# EAGLE board OpenBook_PCB_Design (EAGLE 9.7.0)
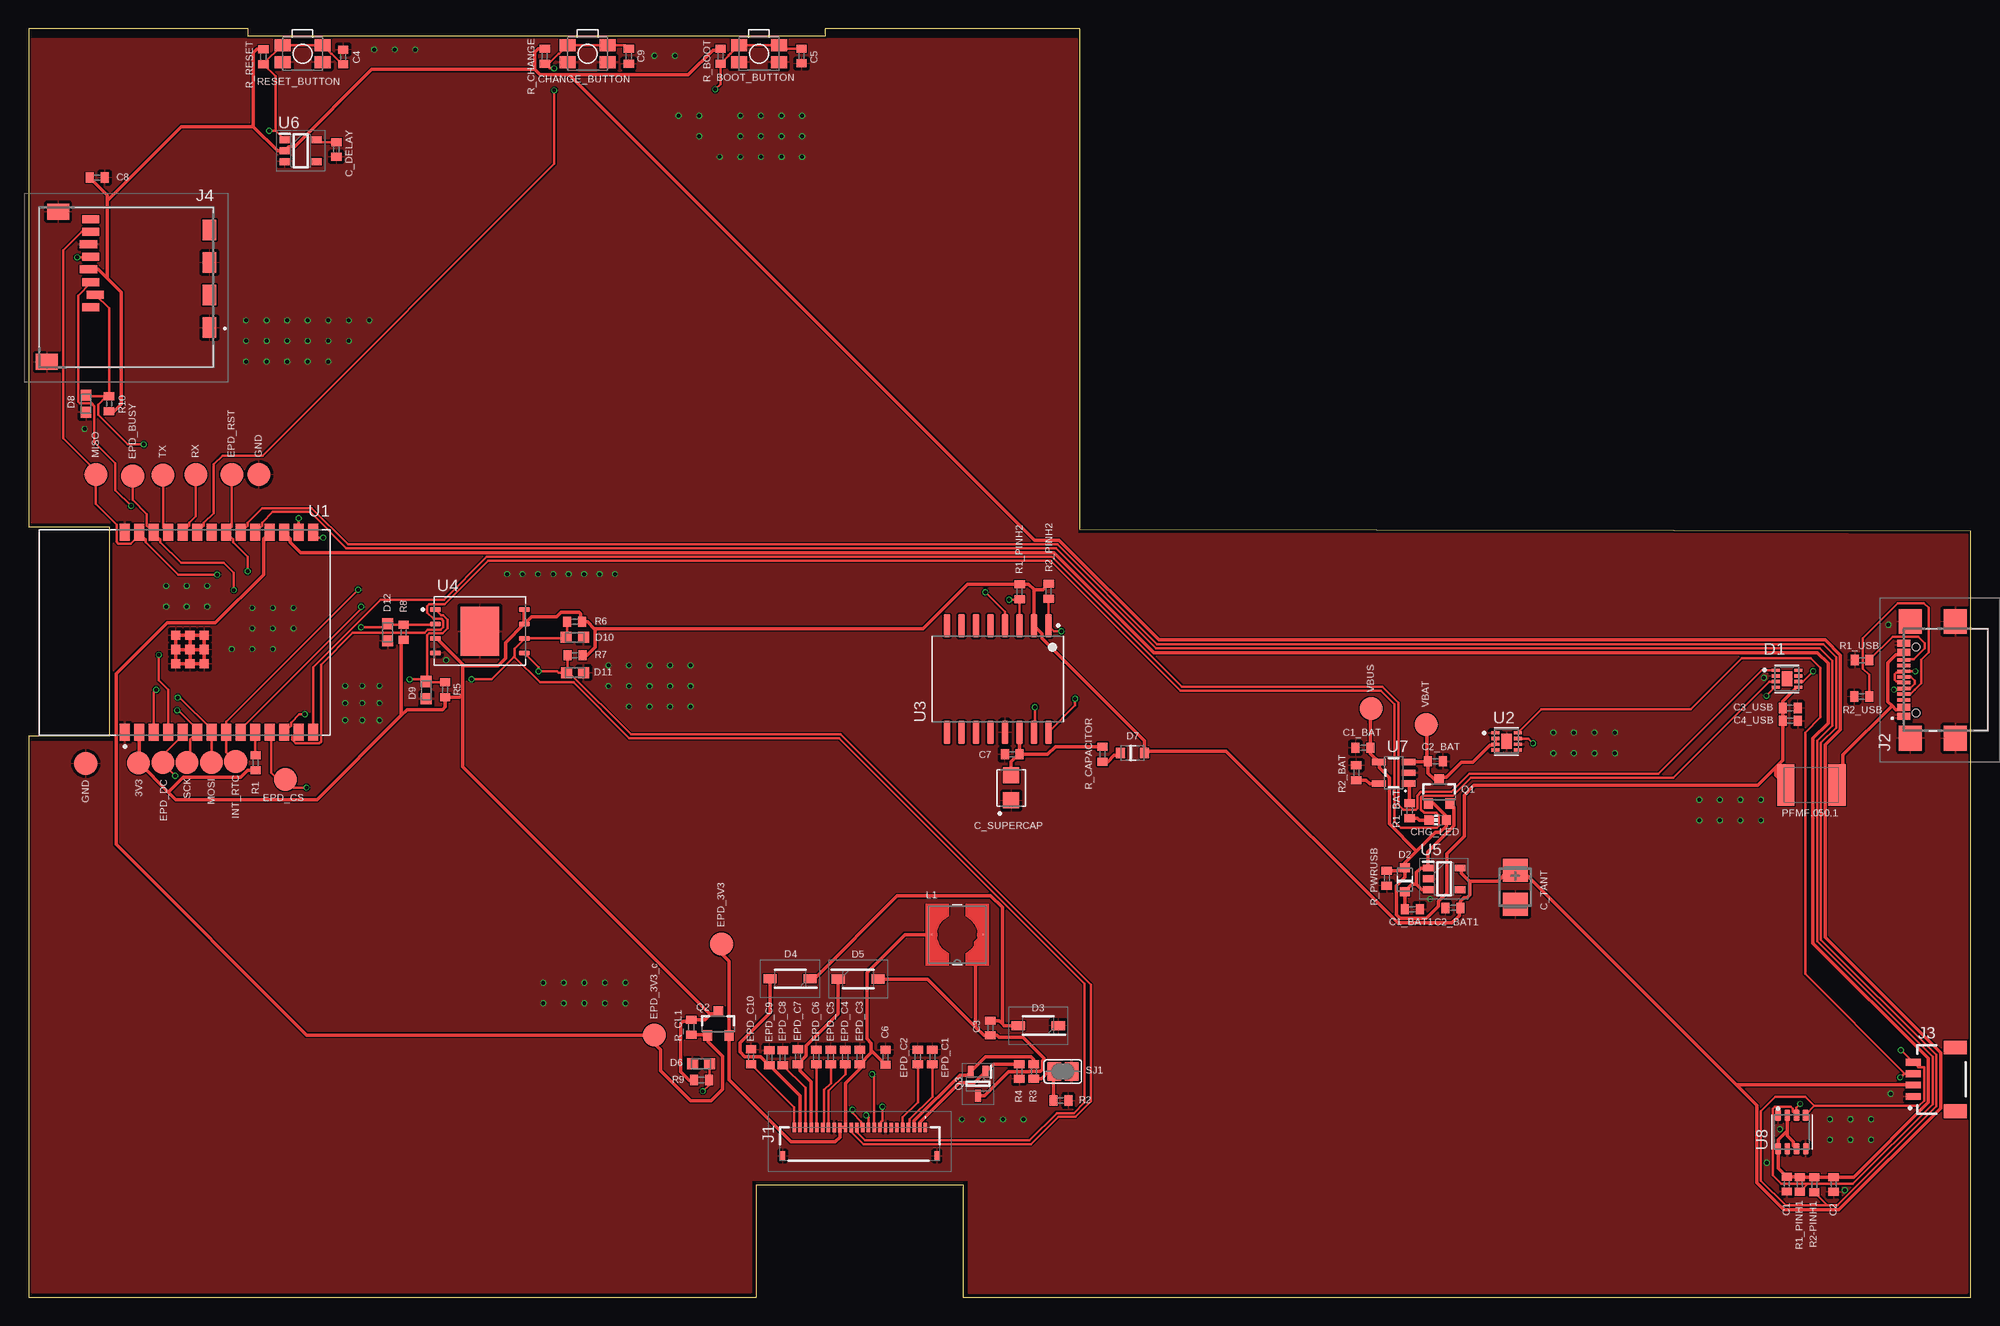
[diagram p0: board, top side]
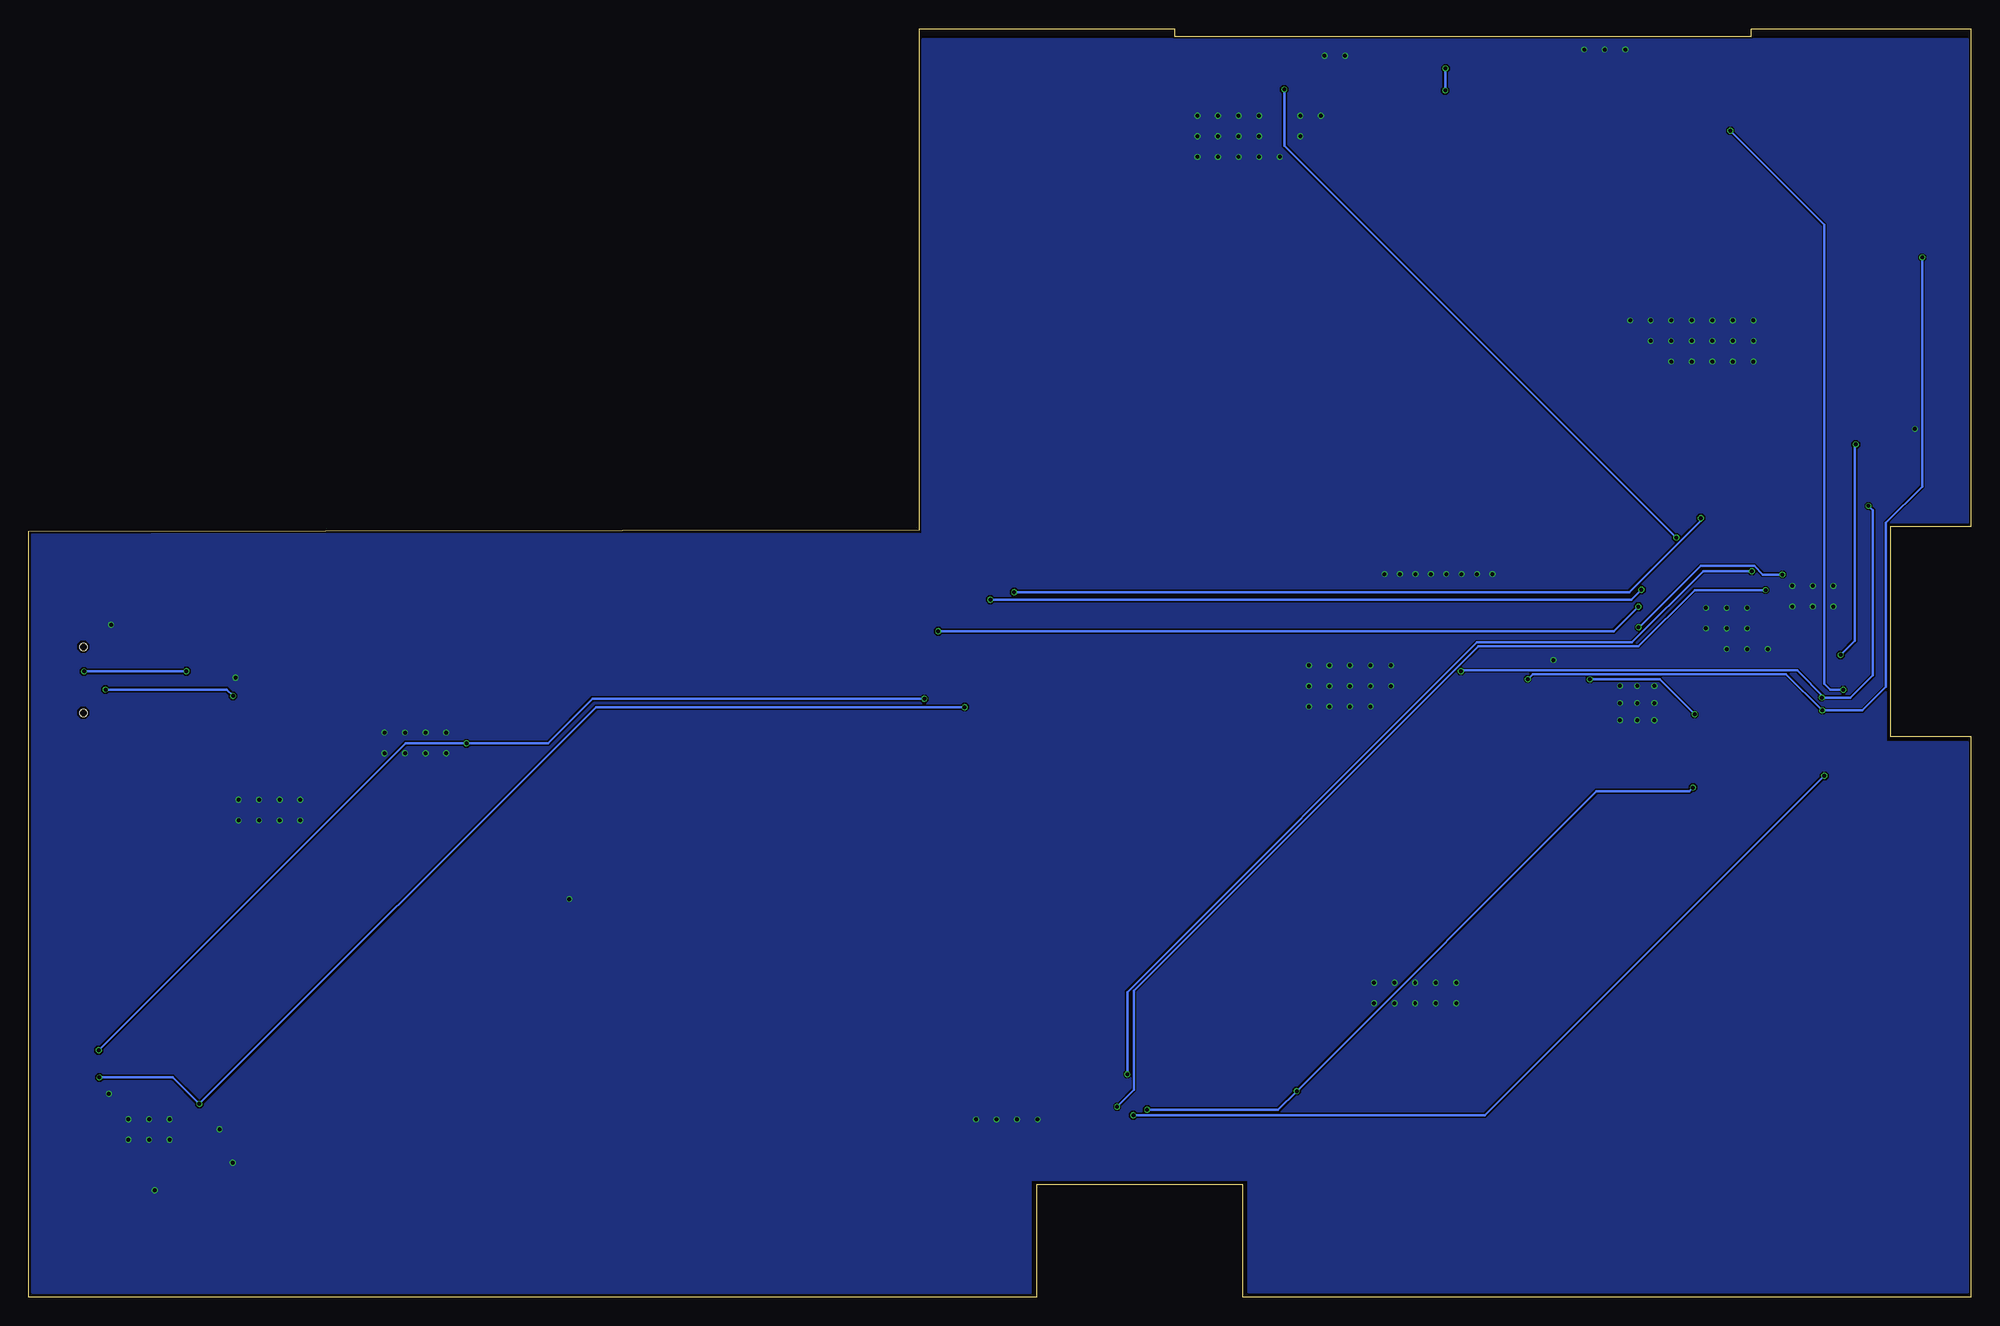
[diagram p1: board, bottom side, seen from below]

Size 170.08 x 111.07 mm. Coordinates in mm from the lower left corner, seen from the top.
Outline: 0,0 63.76,0 63.76,9.87 81.82,9.87 81.82,0.01 131.18,0 170.08,0 170.08,67.07 92.07,67.2 92.07,111.07 69.75,111.07 69.75,110.38 19.21,110.38 19.21,111.07 0,111.07 0,67.47 7.08,67.46 7.08,49.1 0,49.11 0,0
Outline: 0,0 0,0
Copper layers (1*16): Top / Bottom
Stack-up Default Layer Stack: Top User Defined 0.035mm / Dielectric-1 Core:086 1mm / Bottom User Defined 0.035mm
Design rules: minimum copper width 0.2mm, minimum drill size 0.2mm, copper clearance wire_polygon to wire_polygon 5mil, copper clearance wire_polygon to pad_smd 5mil, copper clearance wire_polygon to via 5mil, copper clearance pad_smd to pad_smd 5mil, copper clearance pad_smd to via 5mil, copper clearance via to via 5mil, copper clearance smd to pad (same net) 5mil, copper clearance smd to via (same net) 5mil, copper clearance smd to smd (same net) 5mil, dimension clearance 0.2mm, restrict clearance 0mil, via restrict clearance 0mil, solder-mask clearance 0mil, drill distance 6mil, keepout clearance 0mil

## Footprints (pad centres in the part's own frame; a part is rotated, then mirrored left to right if it is on the bottom)
MYBUTTON = smd 1.4 x 1.05: 1 1.75,0.75; 2 -1.75,0.75; 3 -1.75,-0.75; 4 1.75,-0.75
EAGLE-LTSPICE_C0402 = smd 0.7 x 0.9: 1 -0.65,0; 2 0.65,0
CAPCP3225X100N = smd 1.4 x 1.4: 1 -1.1,0; 2 1.1,0
RCL_CT3528 = smd 2 x 2.2: + -1.5,0; - 1.5,0
ADAFRUIT_CHIP-LED0603 = smd 0.8 x 0.8: A 0,-0.75; C 0,0.75
SON50P200X200X80-9N = smd 0.76 x 0.27: 1 -0.985,0.75; 2 -0.985,0.25; 3 -0.985,-0.25; 4 -0.985,-0.75; 5 0.985,-0.75; 6 0.985,-0.25; 7 0.985,0.25; 8 0.985,0.75 | smd 0.9 x 1.3: 9 0,0
ESP32_WROVER_AVX---SD0805S020S1R0_AVX_SD0805S020S1R0_0 = smd 0.8 x 0.9: 1 -1.05,0; 2 1.05,0
SOD3716X135N = smd 1.15 x 0.8: 1 -1.75,0; 2 1.75,0
DIOC1608X36N = smd 0.97 x 0.94: 1 -0.75,0; 2 0.75,0
FH34SRJ24S05SH99 = smd 0.3 x 0.8: 1 5.75,1.45; 2 5.25,1.45; 3 4.75,1.45; 4 4.25,1.45; 5 3.75,1.45; 6 3.25,1.45; 7 2.75,1.45; 8 2.25,1.45; 9 1.75,1.45; 10 1.25,1.45; 11 0.75,1.45; 12 0.25,1.45; 13 -0.25,1.45; 14 -0.75,1.45; 15 -1.25,1.45; 16 -1.75,1.45; 17 -2.25,1.45; 18 -2.75,1.45; 19 -3.25,1.45; 20 -3.75,1.45; 21 -4.25,1.45; 22 -4.75,1.45; 23 -5.25,1.45; 24 -5.75,1.45 | smd 0.4 x 0.8: MP1 6.75,-1.05; MP2 -6.75,-1.05
SAMACSYS_PARTS_USB4110GFA = smd 0.3 x 1.15: A1 -3.35,3.678; A4 -2.55,3.678; A5 -1.25,3.678; A6 -0.25,3.678; A7 0.25,3.678; A8 1.25,3.678; A9 2.55,3.678; A12 3.35,3.678; B1 3.05,3.678; B4 2.25,3.678; B5 1.75,3.678; B6 0.75,3.678; B7 -0.75,3.678; B8 -1.75,3.678; B9 -2.25,3.678; B12 -3.05,3.678 | smd 2.18 x 2: MP1 -5.11,-0.827; MP2 5.11,-0.827; MP3 -5.11,3.103; MP4 5.11,3.103 | hole 0.65: -2.89,2.603; 2.89,2.603
JST04_1MM_RA = smd 0.6 x 1.35: 1 -1.5,0; 2 -0.5,0; 3 0.5,0; 4 1.5,0 | smd 1.2 x 2: NC1 2.8,-3.675; NC2 -2.8,-3.675
112ATAARR03ATTEND = smd 1.8 x 1.2: G1 10.6,10.4; G2 4.9,10.4; S1 7.75,10.4; S2 2.05,10.4 | smd 1.4 x 1.9: G3 13.6,-3.85; G4 0.45,-2.85 | smd 0.7 x 1.5: P1 8.8,0; P2 7.7,0.4; P3 6.6,0; P4 5.5,-0.2; P5 4.4,0; P6 3.3,-0.2; P7 2.2,0; P8 1.1,0
IND_4828-WE-TPC_WRE = smd 0.127 x 0.127: 1 -2.286,0; 2 2.286,0
ESP32C6_VARISTOR_CT/CN1812 = smd 1.5 x 3.6: 1 -2.25,0; 2 2.25,0
ESP32_WROVER_SPARKFUN-DISCRETESEMI_SOT23-3 = smd 0.8 x 0.9: 1 -0.95,-1; 2 0.95,-1; 3 0,1.1
SOT65P210X110-3N = smd 1.05 x 0.5: 1 -1.05,0.65; 2 -1.05,-0.65; 3 1.05,0
ESP32_WROVER_EAGLE-LTSPICE_R0402 = smd 0.7 x 0.9: 1 -0.65,0; 2 0.65,0
SJ = smd 1.168 x 1.6: 1 -0.762,0; 2 0.762,0
TP20R = smd 2 x 2: TP 0,0
XCVR_ESP32-C6-WROOM-1-N8 = smd 1.5 x 0.9: 1 -8.75,5.26; 2 -8.75,3.99; 3 -8.75,2.72; 4 -8.75,1.45; 5 -8.75,0.18; 6 -8.75,-1.09; 7 -8.75,-2.36; 8 -8.75,-3.63; 9 -8.75,-4.9; 10 -8.75,-6.17; 11 -8.75,-7.44; 12 -8.75,-8.71; 13 -8.75,-9.98; 14 -8.75,-11.25; 15 8.75,-11.25; 16 8.75,-9.98; 17 8.75,-8.71; 18 8.75,-7.44; 19 8.75,-6.17; 20 8.75,-4.9; 21 8.75,-3.63; 22 8.75,-2.36; 23 8.75,-1.09; 24 8.75,0.18; 25 8.75,1.45; 26 8.75,2.72; 27 8.75,3.99; 28 8.75,5.26 | smd 0.8 x 0.8: 29_1 -2.755,0.79; 29_2 -1.505,0.79; 29_3 -0.255,0.79; 29_4 -2.755,-0.46; 29_5 -1.505,-0.46; 29_6 -0.255,-0.46; 29_7 -2.755,-1.71; 29_8 -1.505,-1.71; 29_9 -0.255,-1.71
SOIC127P1032X265-16N = smd 2.05 x 0.59: 1 -4.655,4.445; 2 -4.655,3.175; 3 -4.655,1.905; 4 -4.655,0.635; 5 -4.655,-0.635; 6 -4.655,-1.905; 7 -4.655,-3.175; 8 -4.655,-4.445; 9 4.655,-4.445; 10 4.655,-3.175; 11 4.655,-1.905; 12 4.655,-0.635; 13 4.655,0.635; 14 4.655,1.905; 15 4.655,3.175; 16 4.655,4.445
SON127P600X800X80-9N = smd 0.94 x 0.44: 1 -3.895,1.905; 2 -3.895,0.635; 3 -3.895,-0.635; 4 -3.895,-1.905; 5 3.895,-1.905; 6 3.895,-0.635; 7 3.895,0.635; 8 3.895,1.905 | smd 3.4 x 4.3: 9 0,0
SOT95P280X120-5N = smd 0.9 x 0.6: 1 -1.4,0.95; 2 -1.4,0; 3 -1.4,-0.95; 4 1.4,-0.95; 5 1.4,0.95
SOT95P280X125-5N = smd 0.9 x 0.6: 1 -1.4,0.95; 2 -1.4,0; 3 -1.4,-0.95; 4 1.4,-0.95; 5 1.4,0.95
ESP32_WROVER_SPARKFUN-IC-POWER_SOT23-5 = smd 0.55 x 1.2: 1 -0.95,-1.3; 2 0,-1.3; 3 0.95,-1.3; 4 0.95,1.3; 5 -0.95,1.3
ESP32_WROVER_BME680_PSON80P300X300X100-8N = smd 1.016 x 0.5: 1 1.458,1.2; 2 1.458,0.4; 3 1.458,-0.4; 4 1.458,-1.2; 5 -1.458,-1.22; 6 -1.458,-0.4; 7 -1.458,0.4; 8 -1.458,1.2

## Placement (x,y rotation side)
BOOT_BUTTON  [MYBUTTON]  63.95,108.87 180 top
C1  100nF  [EAGLE-LTSPICE_C0402]  153.95,9.92 270 top
C1_BAT  4.7uF  [EAGLE-LTSPICE_C0402]  116.84,48.11 180 top
C1_BAT1  4.7uF  [EAGLE-LTSPICE_C0402]  121.16,33.98 0 top
C2  100nF  [EAGLE-LTSPICE_C0402]  158.05,9.88 270 top
C2_BAT  4.7uF  [EAGLE-LTSPICE_C0402]  123.19,46.93 0 top
C2_BAT1  4.7uF  [EAGLE-LTSPICE_C0402]  124.73,34.09 180 top
C3  4.7uF/25V  [EAGLE-LTSPICE_C0402]  84.22,23.59 270 top
C3_USB  100nF  [EAGLE-LTSPICE_C0402]  154.26,51.6 0 top
C4  1uF  [EAGLE-LTSPICE_C0402]  27.55,108.58 90 top
C4_USB  4.7uF  [EAGLE-LTSPICE_C0402]  154.26,50.48 0 top
C5  100nF  [EAGLE-LTSPICE_C0402]  67.69,108.67 270 top
C6  10uF  [EAGLE-LTSPICE_C0402]  75.03,21.04 90 top
C7  100nF  [EAGLE-LTSPICE_C0402]  86.13,47.54 180 top
C8  100nF  [EAGLE-LTSPICE_C0402]  6.01,98.03 0 top
C9  100nF  [EAGLE-LTSPICE_C0402]  52.56,108.66 270 top
C_DELAY  100nF  [EAGLE-LTSPICE_C0402]  26.95,100.49 270 top
C_SUPERCAP  CPH3225A  [CAPCP3225X100N]  86.04,44.6 90 top
C_TANT  100uF  [RCL_CT3528]  130.18,35.9 270 top
CHANGE_BUTTON  [MYBUTTON]  48.95,108.87 180 top
CHG_LED  [ADAFRUIT_CHIP-LED0603]  123.39,41.79 90 top
D1  USBLC6-2SC6Y  [SON50P200X200X80-9N]  153.97,54.15 0 top
D2  ESP32_WROVER_AVX---SD0805S020S1R0_AVX_SD0805S020S1R0_0_0AVX_SD0805S020S1R0_0_0  [ESP32_WROVER_AVX---SD0805S020S1R0_AVX_SD0805S020S1R0_0]  120.51,36.57 90 top
D3  MBR0530  [SOD3716X135N]  88.41,23.79 180 top
D4  MBR0530  [SOD3716X135N]  66.69,27.89 180 top
D5  MBR0530  [SOD3716X135N]  72.65,27.87 0 top
D6  PGB1010603MR  [DIOC1608X36N]  58.88,20.45 0 top
D7  ESP32_WROVER_AVX---SD0805S020S1R0_AVX_SD0805S020S1R0_0_0AVX_SD0805S020S1R0_0_0  [ESP32_WROVER_AVX---SD0805S020S1R0_AVX_SD0805S020S1R0_0]  96.66,47.66 0 top
D8  PGB1010603MR  [DIOC1608X36N]  5.03,78.23 90 top
D9  PGB1010603MR  [DIOC1608X36N]  34.82,53.16 90 top
D10  PGB1010603MR  [DIOC1608X36N]  47.83,57.78 180 top
D11  PGB1010603MR  [DIOC1608X36N]  47.86,54.69 180 top
D12  PGB1010603MR  [DIOC1608X36N]  31.44,58.21 90 top
EPD_C1  1uF/50V  [EAGLE-LTSPICE_C0402]  79.14,21.05 270 top
EPD_C2  1uF/50V  [EAGLE-LTSPICE_C0402]  77.87,21.05 270 top
EPD_C3  0.1uF/50V  [EAGLE-LTSPICE_C0402]  72.79,21.05 270 top
EPD_C4  1uF/50V  [EAGLE-LTSPICE_C0402]  71.52,21.05 270 top
EPD_C5  1uF/50V  [EAGLE-LTSPICE_C0402]  70.25,21.05 270 top
EPD_C6  1uF/50V  [EAGLE-LTSPICE_C0402]  68.98,21.05 270 top
EPD_C7  1uF/50V  [EAGLE-LTSPICE_C0402]  67.36,21.07 270 top
EPD_C8  1uF/50V  [EAGLE-LTSPICE_C0402]  66.03,20.99 270 top
EPD_C9  1uF/50V  [EAGLE-LTSPICE_C0402]  64.87,20.98 270 top
EPD_C10  1uF/50V  [EAGLE-LTSPICE_C0402]  63.27,21.06 270 top
J1  FH34SRJ-24S-0.5SH_99_  [FH34SRJ24S05SH99]  72.79,13.43 0 top
J2  SAMACSYS_PARTS_USB4110-GF-A  [SAMACSYS_PARTS_USB4110GFA]  167.88,54.06 90 top
J3  QWIIC_RIGHT_ANGLE  [JST04_1MM_RA]  165.03,19.09 90 top
J4  112A-TAAR-R03_ATTEND  [112ATAARR03ATTEND]  5.45,95.49 270 top
L1  68uH  [IND_4828-WE-TPC_WRE]  81.32,31.75 180 top
PFMF.050.1  ESP32C6_VARISTORCN1812  [ESP32C6_VARISTOR_CT/CN1812]  156.1,44.85 180 top
Q1  20V/4.2A/52mΩ/1.4W  [ESP32_WROVER_SPARKFUN-DISCRETESEMI_SOT23-3]  123.51,44.24 0 top
Q2  20V/4.2A/52mΩ/1.4W  [ESP32_WROVER_SPARKFUN-DISCRETESEMI_SOT23-3]  60.39,23.93 0 top
Q3  SI1308EDL-T1-GE3  [SOT65P210X110-3N]  83.14,18.69 270 top
R1  10K  [ESP32_WROVER_EAGLE-LTSPICE_R0402]  19.9,46.79 270 top
R1_BAT  200  [ESP32_WROVER_EAGLE-LTSPICE_R0402]  120.93,42.61 90 top
R1_PINH1  10K  [ESP32_WROVER_EAGLE-LTSPICE_R0402]  155.1,9.88 90 top
R1_PINH2  10K  [ESP32_WROVER_EAGLE-LTSPICE_R0402]  86.78,61.78 90 top
R1_USB  5k1  [ESP32_WROVER_EAGLE-LTSPICE_R0402]  160.55,55.79 180 top
R2  2.2  [ESP32_WROVER_EAGLE-LTSPICE_R0402]  90.39,17.24 0 top
R2-PINH1  10K  [ESP32_WROVER_EAGLE-LTSPICE_R0402]  156.35,9.86 90 top
R2_BAT  2K  [ESP32_WROVER_EAGLE-LTSPICE_R0402]  116.26,45.94 270 top
R2_PINH2  10K  [ESP32_WROVER_EAGLE-LTSPICE_R0402]  89.32,61.8 90 top
R2_USB  5k1  [ESP32_WROVER_EAGLE-LTSPICE_R0402]  160.51,52.6 0 top
R3  0.47  [ESP32_WROVER_EAGLE-LTSPICE_R0402]  88.03,19.78 90 top
R4  10K  [ESP32_WROVER_EAGLE-LTSPICE_R0402]  86.76,19.78 90 top
R5  10K  [ESP32_WROVER_EAGLE-LTSPICE_R0402]  36.48,53.19 270 top
R6  10K  [ESP32_WROVER_EAGLE-LTSPICE_R0402]  47.82,59.14 0 top
R7  10K  [ESP32_WROVER_EAGLE-LTSPICE_R0402]  47.84,56.22 0 top
R8  10K  [ESP32_WROVER_EAGLE-LTSPICE_R0402]  32.84,58.21 270 top
R9  10K  [ESP32_WROVER_EAGLE-LTSPICE_R0402]  58.92,19.03 180 top
R10  10K  [ESP32_WROVER_EAGLE-LTSPICE_R0402]  7.05,78.24 270 top
R_BOOT  10K  [ESP32_WROVER_EAGLE-LTSPICE_R0402]  60.59,108.65 90 top
R_CAPACITOR  15  [ESP32_WROVER_EAGLE-LTSPICE_R0402]  94.04,47.56 90 top
R_CHANGE  10K  [ESP32_WROVER_EAGLE-LTSPICE_R0402]  45.2,108.65 90 top
R_CL1  10K  [ESP32_WROVER_EAGLE-LTSPICE_R0402]  58.03,23.65 90 top
R_PWRUSB  100K  [ESP32_WROVER_EAGLE-LTSPICE_R0402]  118.92,36.7 90 top
R_RESET  10K  [ESP32_WROVER_EAGLE-LTSPICE_R0402]  20.56,108.61 90 top
RESET_BUTTON  [MYBUTTON]  23.99,108.87 180 top
SJ1  [SJ]  90.57,19.78 180 top
TP1  TPTP20R  [TP20R]  11.77,71.98 0 top
TP2  TPTP20R  [TP20R]  14.65,72.03 0 top
TP3  TPTP20R  [TP20R]  122.38,50.15 0 top
TP4  TPTP20R  [TP20R]  5.01,46.74 0 top
TP5  TPTP20R  [TP20R]  20.17,72.03 0 top
TP6  TPTP20R  [TP20R]  5.9,72.04 0 top
TP7  TPTP20R  [TP20R]  16.01,46.81 0 top
TP8  TPTP20R  [TP20R]  13.88,46.81 0 top
TP9  TPTP20R  [TP20R]  9.12,71.92 0 top
TP10  TPTP20R  [TP20R]  22.49,45.35 0 top
TP11  TPTP20R  [TP20R]  11.76,46.83 0 top
TP12  TPTP20R  [TP20R]  17.8,72.05 0 top
TP13  TPTP20R  [TP20R]  54.79,22.96 0 top
TP14  TPTP20R  [TP20R]  117.55,51.55 0 top
TP15  TPTP20R  [TP20R]  18.14,46.89 0 top
TP16  TPTP20R  [TP20R]  9.63,46.8 0 top
TP17  TPTP20R  [TP20R]  60.68,30.92 0 top
U1  ESP32-C6-WROOM-1-N8  [XCVR_ESP32-C6-WROOM-1-N8]  13.67,58.22 90 top
U2  MAX17048G+T10  [SON50P200X200X80-9N]  129.41,48.67 0 top
U3  DS3231SN#  [SOIC127P1032X265-16N]  84.86,54.13 270 top
U4  W25Q512JVEIQ  [SON127P600X800X80-9N]  39.51,58.32 0 top
U5  XC6220A331MR-G  [SOT95P280X120-5N]  123.94,36.63 0 top
U6  BD5229G-TR  [SOT95P280X125-5N]  23.83,100.38 0 top
U7  MCP73831  [ESP32_WROVER_SPARKFUN-IC-POWER_SOT23-5]  119.53,45.93 90 top
U8  BME688  [ESP32_WROVER_BME680_PSON80P300X300X100-8N]  154.4,14.48 90 top

## Library data of the parts
BOOT_BUTTON C1 C1_BAT C1_BAT1 C2 C2_BAT C2_BAT1 C3 C3_USB C4 C4_USB C5-C9 C_DELAY C_SUPERCAP CHANGE_BUTTON CHG_LED D2 D7 EPD_C1-EPD_C10 J4 L1 PFMF.050.1 RESET_BUTTON SJ1 U1 U3 U6 = DeskAssistant v19 v1
C_TANT = DeskAssistant v19 v1; SPICEPREFIX: C
D1 = DeskAssistant v19 v1; AVAILABILITY: In Stock; CHECK_PRICES: https://www.snapeda.com/parts/USBLC6-2SC6Y/STMicroelectronics/view-part/?ref=eda; DESCRIPTION: 17V Clamp 5A (8/20µs) Ipp Tvs Diode Surface Mount SOT-23-6; FF: FF; MF: STMicroelectronics; MP: USBLC6-2SC6Y; PACKAGE: SOT-23-6 STMicroelectronics; PRICE: None; SNAPEDA_LINK: https://www.snapeda.com/parts/USBLC6-2SC6Y/STMicroelectronics/view-part/?ref=snap
D3-D5 = DeskAssistant v19 v1; AVAILABILITY: In Stock; CHECK_PRICES: https://www.snapeda.com/parts/MBR0530/Onsemi/view-part/?ref=eda; DESCRIPTION: Diode Schottky 30 V 500mA Surface Mount SOD-123; MF: ON Semiconductor; MP: MBR0530; PACKAGE: SOD-123-2 ON Semiconductor; PRICE: None; PURCHASE-URL: https://www.snapeda.com/api/url_track_click_mouser/?unipart_id=179458&manufacturer=ON Semiconductor&part_name=MBR0530&search_term=None; SNAPEDA_LINK: https://www.snapeda.com/parts/MBR0530/Onsemi/view-part/?ref=snap
D6 D8-D12 = DeskAssistant v19 v1; AVAILABILITY: In Stock; CHECK_PRICES: https://www.snapeda.com/parts/PGB1010603MR/Littelfuse/view-part/?ref=eda; DESCRIPTION: 150V (Typ) Clamp - Ipp Tvs Diode Surface Mount 0603 (1608 Metric); MF: Littelfuse Inc.; MP: PGB1010603MR; PACKAGE: 0603 Littelfuse Inc.; PRICE: None; PURCHASE-URL: https://www.snapeda.com/api/url_track_click_mouser/?unipart_id=5659453&manufacturer=Littelfuse Inc.&part_name=PGB1010603MR&search_term=None; SNAPEDA_LINK: https://www.snapeda.com/parts/PGB1010603MR/Littelfuse/view-part/?ref=snap
J1 = DeskAssistant v19 v1; DESCRIPTION: 24 Position FFC, FPC Connector Contacts, Top and Bottom 0.020" (0.50mm) Surface Mount, Right Angle; HEIGHT: 1.1mm; MANUFACTURER_NAME: Hirose; MANUFACTURER_PART_NUMBER: FH34SRJ-24S-0.5SH(99); MOUSER_PART_NUMBER: 798-FH34SRJ24S05SH99; MOUSER_PRICE-STOCK: https://www.mouser.co.uk/ProductDetail/Hirose-Connector/FH34SRJ-24S-0.5SH99?qs=vcbW%252B4%252BSTIpKBl5ap9J8Fw%3D%3D
J2 = DeskAssistant v19 v1; DESCRIPTION: CONN USB 2.0 TYPE-C R/A SMT; HEIGHT: 3.26mm; MANUFACTURER_NAME: GCT (GLOBAL CONNECTOR TECHNOLOGY); MANUFACTURER_PART_NUMBER: USB4110-GF-A; MOUSER_PART_NUMBER: 640-USB4110-GF-A; MOUSER_PRICE-STOCK: https://www.mouser.co.uk/ProductDetail/GCT/USB4110-GF-A?qs=KUoIvG%2F9IlYiZvIXQjyJeA%3D%3D
J3 = DeskAssistant v19 v1; PROD_ID: CONN-13694
Q1 Q2 = DeskAssistant v19 v1; PROD_ID: DMG2305UX-7
Q3 = DeskAssistant v19 v1; AVAILABILITY: In Stock; CHECK_PRICES: https://www.snapeda.com/parts/SI1308EDL-T1-GE3/Vishay+Siliconix/view-part/?ref=eda; DESCRIPTION: Si1308EDL-T1-GE3 N-channel MOSFET Transistor, 1.5 A, 30 V, 3-Pin SC-70 | Siliconix / Vishay SI1308EDL-T1-GE3; MF: Vishay Siliconix; MP: SI1308EDL-T1-GE3; PACKAGE: SOT-323 Vishay Semiconductor; PRICE: None; PURCHASE-URL: https://www.snapeda.com/api/url_track_click_mouser/?unipart_id=274603&manufacturer=Vishay Siliconix&part_name=SI1308EDL-T1-GE3&search_term=None; SNAPEDA_LINK: https://www.snapeda.com/parts/SI1308EDL-T1-GE3/Vishay+Siliconix/view-part/?ref=snap
R1 R1_BAT R1_PINH1 R1_PINH2 R1_USB R2 R2-PINH1 R2_BAT R2_PINH2 R2_USB R3-R10 R_BOOT R_CAPACITOR R_CHANGE R_CL1 R_PWRUSB R_RESET = DeskAssistant v19 v1; SPICEMODEL: NONE; SPICEPREFIX: R
TP1 = DeskAssistant v19 v1; TP_SIGNAL_NAME: TX
TP2 = DeskAssistant v19 v1; TP_SIGNAL_NAME: RX
TP3 = DeskAssistant v19 v1; TP_SIGNAL_NAME: VBAT
TP4 TP5 = DeskAssistant v19 v1; TP_SIGNAL_NAME: GND
TP6 = DeskAssistant v19 v1; TP_SIGNAL_NAME: MISO
TP7 = DeskAssistant v19 v1; TP_SIGNAL_NAME: MOSI
TP8 = DeskAssistant v19 v1; TP_SIGNAL_NAME: SCK
TP9 = DeskAssistant v19 v1; TP_SIGNAL_NAME: EPD_BUSY
TP10 = DeskAssistant v19 v1; TP_SIGNAL_NAME: EPD_CS
TP11 = DeskAssistant v19 v1; TP_SIGNAL_NAME: EPD_DC
TP12 = DeskAssistant v19 v1; TP_SIGNAL_NAME: EPD_RST
TP13 = DeskAssistant v19 v1; TP_SIGNAL_NAME: EPD_3V3_c
TP14 = DeskAssistant v19 v1; TP_SIGNAL_NAME: VBUS
TP15 = DeskAssistant v19 v1; TP_SIGNAL_NAME: INT_RTC
TP16 = DeskAssistant v19 v1; TP_SIGNAL_NAME: 3V3
TP17 = DeskAssistant v19 v1; TP_SIGNAL_NAME: EPD_3V3
U2 = DeskAssistant v19 v1; AVAILABILITY: In Stock; CHECK_PRICES: https://www.snapeda.com/parts/MAX17048G+T10/Analog+Devices/view-part/?ref=eda; DESCRIPTION: 3µA 1-Cell/2-Cell Fuel Gauge with ModelGauge; MF: Analog Devices; MP: MAX17048G+T10; PACKAGE: TDFN-8 Maxim; PRICE: None; PURCHASE-URL: https://www.snapeda.com/api/url_track_click_mouser/?unipart_id=329239&manufacturer=Analog Devices&part_name=MAX17048G+T10&search_term=None; SNAPEDA_LINK: https://www.snapeda.com/parts/MAX17048G+T10/Analog+Devices/view-part/?ref=snap
U4 = DeskAssistant v19 v1; AVAILABILITY: In Stock; CHECK_PRICES: https://www.snapeda.com/parts/W25Q512JVEIQ/Winbond+Electronics/view-part/?ref=eda; DESCRIPTION: FLASH - NOR Memory IC 512Mb (64M x 8) SPI - Quad I/O 133 MHz 8-WSON (8x6); MF: Winbond Electronics; MP: W25Q512JVEIQ; PACKAGE: Package; PRICE: None; SNAPEDA_LINK: https://www.snapeda.com/parts/W25Q512JVEIQ/Winbond+Electronics/view-part/?ref=snap
U5 = DeskAssistant v19 v1; DESCRIPTION: LDO Voltage Regulators; HEIGHT: 1.2mm; MANUFACTURER_NAME: Torex; MANUFACTURER_PART_NUMBER: XC6220A331MR-G; MOUSER_PART_NUMBER: 865-XC6220A331MR-G; MOUSER_PRICE-STOCK: https://www.mouser.co.uk/ProductDetail/Torex-Semiconductor/XC6220A331MR-G?qs=AsjdqWjXhJ8ZSWznL1J0gg%3D%3D
U7 = DeskAssistant v19 v1; PROD_ID: IC-09995
U8 = DeskAssistant v19 v1; AVAILABILITY: Unavailable; DESCRIPTION: Integrated Environmental Unit; MF: Bosch Sensortec; MP: BME680; PACKAGE: LGA-8 Bosch Tools; PRICE: None

## Nets
3V3: C2_BAT1.1 C8.1 C_TANT.+ D7.2 J3.2 J4.P4 Q2.3 R1.2 R1_PINH2.2 R2_PINH2.2 R5.2 R6.2 R7.2 R8.2 R9.2 R10.2 R_BOOT.2 R_CHANGE.2 R_CL1.2 R_RESET.2 TP16.TP U1.2 U3.2 U4.3 U4.7 U4.8 U5.5 U6.2
32KHZ: R2_PINH2.1 U1.9 U3.1
DN: D1.4 J2.A7 J2.B7
DP: D1.6 J2.A6 J2.B6
EPD_3V3: C6.1 EPD_C3.2 J1.15 J1.16 L1.2 Q2.2 TP17.TP
EPD_3V3_C: Q2.1 R_CL1.1 TP13.TP U1.18
EPD_BUSY: J1.9 TP9.TP U1.26
EPD_CS: D6.2 J1.12 R9.1 TP10.TP U1.11
EPD_DC: J1.11 TP11.TP U1.5
EPD_RST: J1.10 TP12.TP U1.21
FLASH_CS: D9.2 R5.1 U1.12 U4.1
GDR: J1.2 Q3.1 R4.2
GND: BOOT_BUTTON.1 BOOT_BUTTON.2 C1.2 C1_BAT1.2 C1_BAT.2 C2.2 C2_BAT1.2 C2_BAT.2 C3_USB.2 C4.2 C4_USB.2 C5.2 C6.2 C7.2 C8.2 C9.2 C_DELAY.2 C_SUPERCAP.1 C_TANT.- CHANGE_BUTTON.1 CHANGE_BUTTON.2 D1.2 D3.1 D6.1 D8.1 D9.1 D10.1 D11.1 D12.1 EPD_C1.1 EPD_C2.1 EPD_C3.1 EPD_C4.1 EPD_C5.1 EPD_C6.1 EPD_C7.1 EPD_C8.1 EPD_C9.1 EPD_C10.1 J1.8 J1.17 J1.MP1 J1.MP2 J2.A1 J2.A12 J2.B1 J2.B12 J2.MP1 J2.MP2 J2.MP3 J2.MP4 J3.1 J4.G1 J4.G2 J4.G3 J4.G4 J4.P6 R1_USB.2 R2.2 R2_BAT.1 R2_USB.1 R4.1 R_PWRUSB.1 RESET_BUTTON.1 RESET_BUTTON.2 SJ1.1 TP4.TP TP5.TP U1.1 U1.28 U1.29_1 U1.29_2 U1.29_3 U1.29_4 U1.29_5 U1.29_6 U1.29_7 U1.29_8 U1.29_9 U2.1 U2.4 U2.6 U2.9 U3.13 U4.4 U4.9 U5.2 U6.3 U7.2 U8.1 U8.5 U8.7
GPIO8: R1.1 U1.10
I2C_PW: C1.1 C2.1 R1_PINH1.2 R2-PINH1.2 U1.17 U8.2 U8.6 U8.8
INT_RTC: R1_PINH2.1 TP15.TP U1.8 U3.3
IO/BOOT: BOOT_BUTTON.3 BOOT_BUTTON.4 C5.1 R_BOOT.1 U1.15
IO/CHANGE: C9.1 CHANGE_BUTTON.3 CHANGE_BUTTON.4 R_CHANGE.1 U1.23
MISO: D12.2 J4.P7 R8.1 TP6.TP U1.27 U4.2
MOSI: D11.2 J1.14 J4.P3 R7.1 TP7.TP U1.7 U4.5
N$1: C1_BAT1.1 D2.1 Q1.2 U5.1 U5.3
N$2: R1_BAT.2 U7.1
N$3: C3.1 D3.2 D4.1
N$4: J2.A5 R2_USB.2
N$5: CHG_LED.C R1_BAT.1
N$7: J2.B5 R1_USB.1
N$8: C_DELAY.1 U6.5
N$9: EPD_C8.2 J1.22
N$10: EPD_C6.2 J1.20
N$11: EPD_C4.2 J1.18
N$13: R2_BAT.2 U7.5
N$14: EPD_C5.2 J1.19
N$15: EPD_C10.2 J1.24
N$16: D7.1 R_CAPACITOR.1
N$24: EPD_C2.2 J1.5
N$25: EPD_C1.2 J1.4
PREVGH: D5.1 EPD_C7.2 J1.21
PREVGL: D4.2 EPD_C9.2 J1.23
RESE: J1.3 Q3.2 R3.2
RESE': R2.1 R3.1 SJ1.2
RESET: C4.1 R_RESET.1 RESET_BUTTON.3 RESET_BUTTON.4 U1.3 U6.1
RTC_RST: U1.16 U3.4
RX: TP2.TP U1.24
SCK: D10.2 J1.13 J4.P5 R6.1 TP8.TP U1.6 U4.6
SCL: J3.4 R2-PINH1.1 U1.20 U2.7 U3.16 U8.4
SDA: J3.3 R1_PINH1.1 U1.19 U2.8 U3.15 U8.3
SRC: C3.2 D5.2 L1.1 Q3.3
SS_SD: D8.2 J4.P2 R10.1 U1.4
TX: TP1.TP U1.25
USB_D+: D1.1 U1.14
USB_D-: D1.3 U1.13
VBAT: C2_BAT.1 Q1.3 TP3.TP U2.2 U2.3 U7.3
VBUS: C1_BAT.1 C3_USB.1 C4_USB.1 CHG_LED.A D1.5 D2.2 PFMF.050.1.2 Q1.1 R_PWRUSB.2 TP14.TP U7.4
VRTC: C7.1 C_SUPERCAP.2 R_CAPACITOR.2 U3.14
VUSB: J2.A4 J2.A9 J2.B4 J2.B9 PFMF.050.1.1

## Tracks (layer width: path | path; a pad name or v marks a point on that pad's centre or on a via)
3V3
  Top 0.3: U1.2 9.69,47.67 | R7.2 48.92,56.22 49.62,56.92 49.62,58.47 49.54,58.55 | 49.54,58.55 48.95,59.14 R6.2 48.35,59.27 48.35,59.84 48.19,60 46.64,60 46.24,59.59 44.05,59.59 U4.7 | 59.69,24.77 59.74,24.82 60.18,24.82 Q2.3 | 59.69,24.77 59.22,24.3 R_CL1.2 57.91,24.18 57.33,24.18 57.1,23.95 57.1,19.76 57.83,19.03 R9.2 | 59.69,24.77 38.01,46.45 38.01,52.8 | 32.62,50.95 32.62,57.38 32.72,57.48 32.76,57.48 R8.2 | R2_PINH2.2 89.32,62.43 88.84,61.95 88.05,61.95 88.02,61.98 | 88.02,61.98 88.02,58.79 U3.2 88.74,58.09 88.74,57.69 97.71,48.72 D7.2 97.88,47.83 104.86,47.83 119.92,32.78 124.65,32.78 125.27,33.4 125.27,33.99 C2_BAT1.1 125.38,34.68 125.68,34.98 125.96,34.98 126.21,35.23 126.21,36.37 | 149.54,18.61 149.52,18.61 151.32,16.81 151.32,10.05 153.7,7.67 158.52,7.67 167.43,16.58 167.43,21.43 157.33,31.54 157.33,48.39 158.65,49.71 158.65,56.21 157.31,57.56 98.97,57.56 90.24,66.29 88.1,66.29 47.35,107.04 | 149.54,18.61 130.75,37.4 C_TANT.+ 130.12,37.34 129.54,37.34 128.65,36.45 126.29,36.45 126.21,36.37 | 49.54,58.55 78.34,58.55 82.22,62.43 R1_PINH2.2 87.57,62.43 88.02,61.98 | 44.32,107.5 44.32,107.49 44.78,107.04 47.35,107.04 | 44.32,107.5 44.32,108.99 44.63,109.3 R_CHANGE.2 | 47.35,107.04 57.76,107.04 59.92,109.2 60.49,109.2 R_BOOT.2 | 19.68,102.49 21.8,100.38 U6.2 22.79,100.74 23.29,100.74 30.05,107.5 44.32,107.5 | 19.68,102.49 19.68,108.97 19.98,109.26 R_RESET.2 | R10.2 7.51,77.59 8.12,78.2 8.12,87.98 6.91,89.2 | 6.91,89.2 6.12,89.99 J4.P4 | 6.91,96.01 6.91,89.2 | 19.68,102.49 13.38,102.49 6.91,96.01 | U5.5 125.45,37.47 125.45,37.14 126.21,36.37 | 38.01,52.8 37.75,52.54 R5.2 36.49,51.71 36.24,51.46 33.13,51.46 32.62,50.95
  Top 0.3: 9.69,47.67 9.69,46.8 12.24,44.24 | 38.01,52.8 38.01,55.29 38.12,55.29 | 38.12,55.29 41.1,55.29 41.77,55.96 41.77,57.31 U4.7 | U4.7 U4.8 | 38.12,55.29 35.74,57.68 U4.3 | 12.24,44.24 12.9,43.58 25.25,43.58 32.62,50.95 | 9.69,47.67 9.69,46.85 TP16.TP | J3.2 165.01,18.61 149.54,18.61 | R1.2 19.19,46.14 18.58,45.53 13.53,45.53 12.24,44.24 | C8.1 6.91,96.48 6.91,96.01
32KHZ  (via drill 0.35)
  Top 0.2: R2_PINH2.1 89.31,61.14 U3.1 89.78,58.31 v90.43,58.31 | v29.13,60.45 29.13,60.27 18.57,49.72 U1.9
  Bottom 0.2: v90.43,58.31 31.27,58.31 v29.13,60.45
DN  (via drill 0.35)
  Top 0.2: J2.A7 164.82,54.31 165.15,53.98 165.15,53.7 164.76,53.31 J2.B7 164.1,53.21 v163.34,53.21 | D1.4 152.92,53.4 v152.17,52.65
  Bottom 0.2: v163.34,53.21 v163.33,53.21 152.73,53.21 v152.17,52.65
DP  (via drill 0.35)
  Top 0.2: v165.22,54.79 164.22,54.79 J2.B6 164.08,54.69 163.53,54.69 163.4,54.55 163.4,54.07 163.53,53.93 164.08,53.93 J2.A6 | D1.6 155.35,53.9 v156.25,54.81
  Bottom 0.2: v165.22,54.79 156.27,54.79 v156.25,54.81
EPD_3V3
  Top 0.3: TP17.TP 60.68,30.07 61.34,29.41 Q2.2 61.34,19.43 61.34,19.04 66.77,13.62 70.63,13.62 71.04,14.02 J1.16 J1.15 71.53,18.75 72.79,20.01 EPD_C3.2 73.79,21.4 73.79,21.63 | L1.2 76.74,31.75 73.41,28.42 73.41,22.63 73.79,22.25 73.79,21.63 | C6.1 73.79,21.63
EPD_3V3_C
  Top 0.3: TP13.TP 54.79,22.23 55.35,21.67 55.35,19.82 57.95,17.22 59.78,17.22 60.77,18.21 60.77,21.1 59.49,22.39 59.49,22.89 Q2.1 59.37,23 R_CL1.1 | TP13.TP | U1.18 20.57,66.43 20.57,63.27 16.35,59.05 12.12,59.05 7.67,54.6 7.67,39.65 24.36,22.96 TP13.TP
EPD_BUSY  (via drill 0.35)
  Top 0.2: v17.97,61.92 17.97,63.42 17.1,64.3 13.38,64.3 11.55,66.12 11.55,66.38 U1.26 10.36,67.56 10.36,68.57 9.12,69.81 TP9.TP | v74.76,16.69 74.76,15.47 74.66,15.37 74.66,15 J1.9
  Bottom 0.2: v17.97,61.92 24.2,61.92 29.12,57.01 43.14,57.01 73.28,26.86 73.28,18.17 v74.76,16.69
EPD_CS  (via drill 0.35)
  Top 0.2: U1.11 21.23,49.35 21.23,45.94 21.82,45.35 TP10.TP 23.22,44.62 v24.33,44.62 | J1.12 72.91,15 72.91,15.37 72.13,16.15 v72.13,16.43 | D6.2 59.63,19.09 R9.1 59.57,18.59 v59.03,18.06
  Bottom 0.2: v72.13,16.43 60.67,16.43 v59.03,18.06 32.79,44.31 24.65,44.31 v24.33,44.62
EPD_DC  (via drill 0.35)
  Top 0.2: U1.5 13.49,49.22 11.87,47.6 11.87,46.83 | 11.87,46.83 11.87,46.62 v12.84,45.66 | v73.35,15.95 73.54,15.76 J1.11 | TP11.TP 11.87,46.83
  Bottom 0.2: v12.84,45.66 42.55,15.95 v73.35,15.95
EPD_RST  (via drill 0.35)
  Top 0.2: TP12.TP 17.8,67.46 U1.21 17.9,66.38 17.9,66.12 19.19,64.83 v19.19,63.57 | v73.87,19.54 74.04,19.37 J1.10
  Bottom 0.2: v19.19,63.57 23.45,63.57 29.69,57.33 43.27,57.33 73.87,26.73 v73.87,19.54
FLASH_CS  (via drill 0.35)
  Top 0.2: R5.1 35.48,53.84 35.45,53.86 34.87,53.86 D9.2 | D9.2 34.92,54.02 34.92,57.96 35.09,58.13 36.24,58.13 36.7,58.59 36.7,59.32 36.29,59.73 36.11,59.73 U4.1 | U1.12 22.98,50.06 22.98,50.31 23.71,51.04 v24.19,51.04 | D9.2 34.64,54.09 v33.37,54.09
  Bottom 0.2: v24.19,51.04 27.24,54.09 v33.37,54.09
GDR
  Top 0.3: R4.2 84.47,20.42 Q3.1 82.85,18.8 81.51,18.8 78.04,15.32 J1.2
GND  (via drill 0.35)
  Top 0.3: U1.29_6 U1.29_3 U1.29_2 | U1.29_6 U1.29_9 U1.29_8 | U1.29_8 U1.29_5 | U1.29_5 | U1.29_5 U1.29_2 | U1.29_2 U1.29_1 U1.29_4 | U1.29_4 U1.29_7 U1.29_8 | U1.29_4 U1.29_5 | U1.29_5 U1.29_6
  other vias: 36.55,55.79 4.91,76.03 152.19,11.78 159.03,9.39 163.05,17.83 122.73,34.87 162.85,58.89 151.96,54.24 153.36,14.72 15.65,62.28 13.85,62.28 12.05,62.28 15.65,60.48 13.85,60.48 12.05,60.48 23.2,60.36 17.8,56.76 19.6,56.76 21.4,56.76 19.6,58.56 21.4,58.56 23.2,58.56 19.6,60.36 21.4,60.36 30.72,53.52 27.72,50.52 29.22,50.52 30.72,50.52 27.72,52.02 29.22,52.02 30.72,52.02 27.72,53.52 29.22,53.52 51.35,63.32 50,63.32 48.65,63.32 47.3,63.32 45.95,63.32 44.6,63.32 43.25,63.32 41.9,63.32 57.97,55.32 56.17,55.32 54.37,55.32 52.57,55.32 50.77,55.32 57.97,53.52 52.57,51.72 54.37,51.72 56.17,51.72 57.97,51.72 50.77,53.52 52.57,53.52 54.37,53.52 56.17,53.52 33.87,109.24 32.07,109.24 30.27,109.24 56.6,108.7 54.8,108.7 67.72,103.44 65.92,103.44 64.12,103.44 62.32,103.44 58.72,103.44 56.92,103.44 67.72,101.64 65.92,101.64 64.12,101.64 60.52,99.84 62.32,99.84 64.12,99.84 65.92,99.84 67.72,99.84 58.72,101.64 62.32,101.64 29.85,85.53 28.05,85.53 26.25,85.53 24.45,85.53 22.65,85.53 20.85,85.53 19.05,85.53 28.05,83.73 26.25,83.73 24.45,83.73 19.05,81.93 20.85,81.93 22.65,81.93 24.45,81.93 26.25,81.93 19.05,83.73 20.85,83.73 22.65,83.73 87.12,15.58 85.32,15.58 83.52,15.58 81.72,15.58 52.27,27.54 50.47,27.54 45.07,25.74 46.87,25.74 48.67,25.74 50.47,25.74 52.27,25.74 45.07,27.54 46.87,27.54 48.67,27.54 138.92,49.44 137.12,49.44 135.32,49.44 133.52,49.44 138.92,47.64 137.12,47.64 135.32,47.64 133.52,47.64 161.33,15.6 159.53,15.6 157.73,15.6 161.33,13.8 159.53,13.8 157.73,13.8 151.7,43.56 149.9,43.56 148.1,43.56 146.3,43.56 151.7,41.76 149.9,41.76 148.1,41.76 146.3,41.76
  pour Top: 0.16,110.22 91.88,110.22 91.88,66.89 169.83,66.89 169.83,0.34 82.24,0.34 82.24,10.23 63.36,10.23 63.36,0.38 0.09,0.38 0.09,48.69 7.38,48.69 7.38,67.76 0.16,67.76
  pour Bottom: 0.16,110.22 91.88,110.22 91.88,66.89 169.83,66.89 169.83,66.89 169.83,0.34 82.24,0.34 82.24,10.23 63.36,10.23 63.36,0.38 0.09,0.38 0.09,48.69 7.38,48.69 7.38,67.76 0.16,67.76
GPIO8
  Top 0.2: R1.1 19.85,47.45 U1.10
I2C_PW
  Top 0.3: 154,14.61 U8.2 | 154,14.61 153.2,13.81 U8.8 153.2,11.33 C1.1 155.06,10.57 R1_PINH1.2 155.12,10.51 R2-PINH1.2 158.03,10.51 C2.1 159.81,10.53 166.35,17.08 166.35,20.92 156.25,31.02 156.25,48.94 157.57,50.26 157.57,55.5 156.63,56.44 98.56,56.44 89.79,65.21 23.82,65.21 22.93,66.1 22.93,66.43 U1.17 | U8.6 154.53,13.29 154.53,13.61 154,14.13 154,14.61
INT_RTC  (via drill 0.35)
  Top 0.2: U3.3 86.77,61.11 R1_PINH2.1 86.73,61.08 v85.86,61.08 | v28.87,61.94 17.3,50.38 U1.8 17.3,47.73 TP15.TP
  Bottom 0.2: v85.86,61.08 29.73,61.08 v28.87,61.94
IO/BOOT  (via drill 0.35)
  Top 0.2: v60.12,105.74 60.59,106.21 R_BOOT.1 61.27,108.68 61.27,108.74 61.41,108.87 61.45,108.87 BOOT_BUTTON.4 BOOT_BUTTON.3 66,109.32 C5.1 | v25.8,66.51 25.38,66.51 U1.15
  Bottom 0.2: v60.12,105.74 60.12,100.83 v25.8,66.51
IO/CHANGE  (via drill 0.35)
  Top 0.2: v46.04,105.65 46.04,99.24 20.49,73.69 16.98,73.69 16.2,72.91 16.2,68.65 15.36,67.81 15.36,67.56 U1.23 | v46.01,107.58 45.62,107.58 45.31,107.89 | C9.1 52.25,109.62 CHANGE_BUTTON.3 CHANGE_BUTTON.4 46.45,108.87 46.41,108.87 45.43,107.89 45.31,107.89 | R_CHANGE.1 45.31,107.89
  Bottom 0.2: v46.04,105.65 46.04,107.56 v46.01,107.58
MISO  (via drill 0.35)
  Top 0.2: U4.2 35.53,58.86 R8.1 31.54,58.86 D12.2 31.13,58.65 v29.1,58.65 | U1.27 10.28,66.38 | J4.P7 4.66,93.29 3.03,91.65 3.03,75.23 5.9,72.35 TP6.TP 5.9,69.45 7.73,67.63 7.73,66.13 7.87,65.99 8.96,65.99 9.34,66.38 10.28,66.38 | 10.28,66.38 10.28,66.12 13.12,63.28 v16.51,63.28
  Bottom 0.2: v16.51,63.28 18.22,63.28 18.99,64.05 23.66,64.05 29.06,58.65 v29.1,58.65
MOSI  (via drill 0.35)
  Top 0.2: 47.19,54.69 D11.2 46.42,54.69 46.3,54.8 v44.66,54.8 44.66,55.16 U4.5 | 47.19,54.69 47.33,54.69 52.74,49.28 71.12,49.28 93.02,27.38 93.02,17.17 91.66,15.81 90.17,15.81 87.78,13.42 73.09,13.42 72.03,14.48 72.04,14.48 J1.14 | J4.P3 5.45,88.81 4.34,87.69 4.34,83.9 4.33,83.9 4.33,78.4 4.47,78.26 5.52,78.26 5.75,78.03 5.75,74.86 7.58,73.03 7.58,70.68 v8.97,69.28 | v13.07,52.51 13.24,52.51 16.03,49.72 U1.7 16.03,46.83 TP7.TP | R7.1 47.19,54.69
  Bottom 0.2: v8.97,69.28 8.58,68.89 8.58,54.48 10.55,52.51 12.83,52.51 | 12.83,52.51 v13.07,52.51 | v44.66,54.8 44.57,54.9 15.22,54.9 12.83,52.51
N$1
  Top 0.3: 121.54,36.15 121.54,37.21 121.89,37.57 122.52,37.57 U5.1 122.54,39 124.82,41.28 124.82,42.89 Q1.2 | 121.54,36.15 122,35.68 U5.3 | C1_BAT1.1 D2.1 121.14,36.15 121.54,36.15
N$2
  Top 0.3: R1_BAT.2 120.93,44.88 U7.1
N$3
  Top 0.3: D4.1 68.8,27.89 76.07,35.15 84.25,35.15 85.27,34.13 85.27,23.95 | C3.1 84.98,24.24 85.27,23.95 | 85.27,23.95 85.43,23.79 D3.2
N$4
  Top 0.2: R2_USB.2 161.16,54.52 160.62,55.05 160.62,57.7 163.67,60.76 165.96,60.76 166.37,60.35 166.37,56.49 165.72,55.84 165.72,53.78 165.15,53.21 165.15,53.19 164.77,52.81 J2.A5
N$5
  Top 0.3: R1_BAT.1 121.61,41.96 121.79,41.79 CHG_LED.C
N$7
  Top 0.2: R1_USB.1 161.2,55.82 163.21,57.84 165.46,57.84 166.04,57.25 166.04,56.83 165.07,55.86 164.25,55.86 J2.B5
N$8
  Top 0.2: C_DELAY.1 25.41,101.14 U6.5
N$9
  Top 0.2: EPD_C8.2 68.04,18.34 J1.22
N$10
  Top 0.2: EPD_C6.2 68.98,14.94 J1.20
N$11
  Top 0.2: EPD_C4.2 71.52,19.55 70.04,18.07 J1.18
N$13
  Top 0.3: U7.5 117.43,44.98 117.12,45.29 R2_BAT.2
N$14
  Top 0.2: J1.19 69.66,15 69.66,18.16 70.25,18.75 EPD_C5.2
N$15
  Top 0.2: EPD_C10.2 67.04,16.64 J1.24
N$16
  Top 0.3: R_CAPACITOR.1 94.52,46.91 95.06,47.44 95.39,47.44 D7.1
N$24
  Top 0.2: EPD_C2.2 77.87,17.09 76.54,15.76 J1.5
N$25
  Top 0.2: EPD_C1.2 79.14,17.58 77.16,15.61 77.16,15 J1.4
PREVGH
  Top 0.3: D5.1 70.9,24.82 68.1,22.02 68.1,21.16 EPD_C7.2 67.56,20.22 67.56,19.84 68.53,18.87 J1.21
PREVGL
  Top 0.3: D4.2 64.94,24.94 62.28,22.28 62.28,21.5 62.7,21.08 64.1,21.08 65.31,19.87 | J1.23 67.54,15.59 67.54,15.6 67.54,17.64 65.75,19.43 65.31,19.87 | EPD_C9.2 65.31,19.89 65.31,19.87
RESE
  Top 0.3: R3.2 88.01,20.44 88.01,20.83 87.79,21.06 83.81,21.06 Q3.2 82.21,19.46 81.54,19.46 77.54,15.45 J1.3
RESE'
  Top 0.3: R2.1 89.74,19.71 89.79,19.76 SJ1.2 89.3,19.78 88.68,19.15 88.05,19.15 R3.1 | R2.1
RESET  (via drill 0.35)
  Top 0.2: U1.3 10.95,52.97 v11.18,53.19 | v21.07,102.13 21.63,102.13 | 21.63,102.13 U6.1 | C4.1 27.48,107.93 26.54,108.88 26.49,108.88 RESET_BUTTON.3 RESET_BUTTON.4 22.2,109.62 20.56,107.99 R_RESET.1 21.63,106.9 21.63,102.13
  Bottom 0.2: v21.07,102.13 12.84,93.89 12.84,53.7 12.33,53.19 v11.18,53.19
RTC_RST  (via drill 0.35)
  Top 0.2: U1.16 | U1.16 v23.65,68.22 | v83.78,61.73 85.5,60.01 U3.4
  Bottom 0.2: v23.65,68.22 23.65,67.98 29.91,61.73 v83.78,61.73
RX
  Top 0.2: U1.24 14.09,67.56 14.09,67.81 14.65,68.37 TP2.TP
SCK  (via drill 0.35)
  Top 0.2: 42.58,56.06 44.79,53.85 47.71,53.85 52.6,48.95 70.98,48.95 92.46,27.47 92.46,17.08 91.52,16.14 90.03,16.14 87.64,13.75 73.25,13.75 72.54,14.46 J1.13 | 42.58,56.06 42.58,56.77 43.41,57.6 U4.6 46.98,57.68 D10.2 47.17,57.87 R6.1 | J4.P5 5.4,91.03 v4.27,91.03 | v13.01,51.38 13.11,51.38 14.76,49.72 U1.6 14.17,48.88 14.17,47.09 TP8.TP | 42.58,56.06 42.49,56.06 40.55,54.12 v38.81,54.12
  Bottom 0.2: v38.81,54.12 38.36,54.57 16.2,54.57 v13.01,51.38 9.51,51.38 7.44,53.44 7.44,67.81 4.27,70.98 v4.27,91.03
SCL  (via drill 0.35)
  Top 0.2: 156.34,16.76 155.6,16.01 U8.4 | U1.20 19.17,67.56 19.17,67.81 20.44,69.08 24.79,69.08 27.97,65.91 90.08,65.91 98.81,57.18 157.15,57.18 158.27,56.06 158.27,49.87 156.95,48.55 156.95,31.33 167.05,21.22 167.05,16.73 158.37,8.05 157.51,8.05 | 157.51,8.05 153.85,8.05 151.7,10.2 151.7,16.29 152.96,17.55 155.55,17.55 156.34,16.76 | 157.51,8.05 R2-PINH1.1 | v163.94,21.64 163.98,21.64 J3.4 165.48,20.14 165.97,20.14 165.97,17.23 165.5,16.76 156.34,16.76 | v131.74,48.5 131.31,48.92 U2.7 | v91.65,52.4 91.65,51.82 U3.16
  Bottom 0.2: v163.94,21.64 137.07,48.5 v131.74,48.5 124.6,48.5 120.71,52.4 v91.65,52.4
SDA  (via drill 0.35)
  Top 0.2: U2.8 132.47,51.5 145.55,51.5 150,55.95 156.07,55.95 156.88,55.13 156.88,50.77 155.55,49.44 155.55,28.33 164.3,19.59 J3.3 164.23,19.59 163.9,19.26 v163.87,19.26 | U1.19 20.44,67.56 20.44,67.81 21.38,68.75 24.66,68.75 27.83,65.58 89.95,65.58 98.7,56.83 156.83,56.83 157.95,55.71 157.95,50.06 156.62,48.73 156.62,31.18 166.72,21.07 166.72,16.92 159.74,9.93 155.79,9.93 | 155.79,9.93 R1_PINH1.1 | v155.12,16.93 154.8,16.61 U8.3 154.48,16.26 154.48,16.5 154.31,16.67 152.89,16.67 152.72,16.5 152.72,10.68 153.47,9.93 155.79,9.93 | v88.1,51.67 88.1,49.54 U3.15
  Bottom 0.2: v88.1,51.67 120.39,51.67 v155.12,16.93 157.45,19.26 v163.87,19.26
SRC
  Top 0.3: Q3.3 83.71,17.64 85.83,19.76 87.63,19.76 87.66,19.79 88.6,19.79 88.8,19.99 88.8,20.73 88.9,20.83 88.9,20.93 87.07,22.76 84.96,22.76 84.78,22.94 C3.2 83.64,22.94 82.92,23.66 | 82.92,23.66 82.92,31.07 L1.1 | D5.2 78.71,27.87 82.92,23.66
SS_SD  (via drill 0.35)
  Top 0.2: R10.1 7.05,86.58 J4.P2 | U1.4 12.22,53.21 11.41,54.03 v11.41,56.24 | R10.1 6.81,78.89 6.08,78.16 6.08,77.27 8.69,74.66 v10.09,74.66 | R10.1 5.12,78.89 D8.2
  Bottom 0.2: v11.41,56.24 10.17,57.48 10.17,74.58 v10.09,74.66
TX
  Top 0.2: TP1.TP 11.77,67.42 U1.25
USB_D+
  Top 0.2: D1.1 151.78,54.9 142.7,45.82 126.14,45.82 124.57,44.24 121.93,44.24 121.61,43.92 121.61,42.82 121.47,42.69 120.39,42.69 119.94,43.14 119.94,52.06 118.54,53.45 101.01,53.45 89.63,64.83 40.13,64.83 36.37,61.08 30.83,61.08 24.92,55.17 U1.14
USB_D-
  Top 0.2: D1.3 152.41,53.9 144,45.5 126.28,45.5 124.7,43.92 122.07,43.92 121.94,43.78 121.94,42.7 122.22,42.42 123.28,42.42 123.5,42.2 123.5,41.3 123.3,41.1 122.96,41.1 122.95,41.09 120.16,41.09 119.61,41.64 119.61,51.92 118.4,53.13 100.88,53.13 89.5,64.5 40.26,64.5 36.43,60.67 35.09,60.67 34.92,60.5 34.92,59.94 35.46,59.4 36.15,59.4 36.32,59.23 36.32,58.67 36.1,58.46 34.95,58.46 34.67,58.18 28.39,58.18 25.6,55.38 25.6,48.62 25.47,48.49 23.39,48.49 23.08,48.8 23.08,49.05 23.49,49.47 U1.13
VBAT
  Top 0.3: C2_BAT.1 122.49,46.88 U7.3 | C2_BAT.1 122.43,47.05 122.43,50.11 TP3.TP | C2_BAT.1 122.54,45.89 123.09,45.34 Q1.3 123.72,45.54 124.16,45.54 125.45,46.84 126.46,46.84 127.95,48.34 128.34,48.34 U2.3 U2.2
VBUS
  Top 0.3: TP14.TP 117.55,50.62 117.47,50.55 117.47,50.37 117.5,50.34 117.49,50.34 C1_BAT.1 117.5,47.61 U7.4 118.29,46.82 118.29,46.38 119.16,45.51 119.16,41.45 121.54,39.07 | 121.54,39.07 120.51,38.04 D2.2 | R_PWRUSB.2 118.94,37.37 120.26,37.37 D2.2 | 152.99,46.41 153.61,47.03 C4_USB.1 C3_USB.1 153.61,52.19 154.82,53.4 D1.5 | PFMF.050.1.2 152.99,45.71 152.99,46.41 | 121.54,39.07 123.19,40.72 123.6,40.72 124.14,41.26 CHG_LED.A 124.13,42.14 123.03,43.24 Q1.1 | D2.2 120.51,36.76 119.78,36.03 119.78,35.01 119.78,35 119.78,33.51 120.09,33.2 122.41,33.2 123.45,34.24 123.45,34.66 124.18,35.38 124.18,38.82 125.71,40.35 125.71,43.97 126.58,44.84 151.42,44.84 152.99,46.41
VRTC
  Top 0.3: C7.1 89.24,47.54 89.9,48.21 R_CAPACITOR.2 | C7.1 86.69,47.54 86.04,46.89 C_SUPERCAP.2 | U3.14 86.77,47.56 C7.1
VUSB
  Top 0.3: PFMF.050.1.1 158.87,45.37 158.88,45.37 158.88,47.48 163.17,51.78 | J2.A9 J2.B4 164.13,56.24 163.51,56.24 162.81,55.54 162.81,52.14 163.17,51.78 | J2.B9 J2.A4 164.13,51.44 163.51,51.44 163.17,51.78